# Altium PCB single-though-hole-bottom.PcbDoc
Units mil, origin at the board's own origin, x right, y up, seen from the top; angles counter-clockwise.
Board outline 2305 x 1285.79 mil, 2 copper layers (Top Layer, Bottom Layer), stack 61.7 mil thick; 1 components, 0 nets, 2 pads, 0 vias.
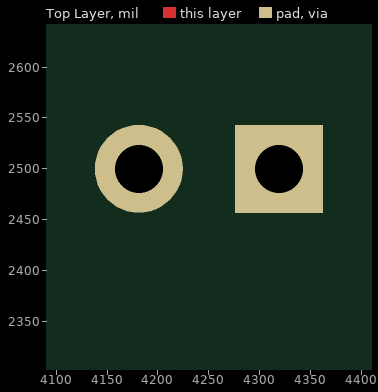
[diagram p0: Top Layer view]
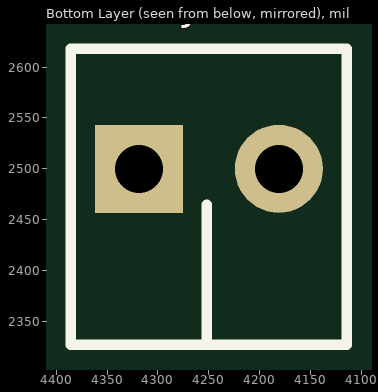
[diagram p1: Bottom Layer view, seen from below]

## Layer stack, top to bottom
Top Solder: solder mask 0.4, Solder Resist, Dk 3.5
Top Layer: signal copper 1.4
Dielectric 1: dielectric 58.9, FR-4, Dk 4.8
Bottom Layer: signal copper 1.4
Bottom Solder: solder mask 0.4, Solder Resist, Dk 3.5

## Board outline
3185,1915 3185,3200.79 5490,3200.79 5490,1915

## Design rules (kind name [scope] priority, off if disabled: settings)
Clearance [All] p1: gap=10 ignorepadtopadclearanceinfootprint=FALSE except(0: Arc-Hole Track-Hole SMDPad-Hole THPad-Hole Via-Hole Fill-Hole Poly-Hole Region-Hole Text-Hole)
PolygonConnect [All] p1: connectstyle=Relief reliefconductorwidth=10 reliefentries=4 polygonreliefangle="90 Angle" airgapwidth=10
RoutingVias [All] p1: holewidth=28 width=50 viastyle="Through Hole" minholewidth=28 minwidth=50 maxholewidth=28 maxwidth=50
SolderMaskExpansion [All] p1: expansion=0 istentingtop=FALSE
Width [All] p1: maxlimit=10 minlimit=10 preferedwidth=10
30 further rules are at their usual default settings.

## Components (designator, comment, footprint, x,y, rotation, side; value= is the part's Value field where it differs from the comment)
J1 "1984617" 1984617 4250,2500 r180 bottom

## Footprints (in the part's own frame and the unit in brackets; to place one, negate y for a bottom-side part, rotate by r counter-clockwise, add the part's x,y. Pads: shape width x height; smd on the part's side, far side on the other; paste and mask are expansions set on the pad)
1984617 [mm] "Phoenix 2-pin 3.5mm screw terminal"
  rect 2.2x2.2 hole 1.2: 1(-1.75,0)
  round 2.2 hole 1.2: 2(1.75,0)
  silkscreen extent -3.45,-4.4 3.45,3, body extent -3.51,-4.5 4.06,3.1, height 9.05

## Part data
J1: "TERM BLK 2POS SIDE ENT 3.5MM PCB", mfg=Phoenix, mpn=1984617, panel_monkey__generated_schlib_path=symbols/1984617-019dd87a.SchLib, panel_monkey__generated_symbol_ref=1984617, panel_monkey__part_id=019dd87a-1e88-7c21-999a-0ec9482a2608, panel_monkey__source_handle=1984617, panel_monkey__source_symbol_ref=1984617, panel_monkey__version_id=019dd87a-1e88-76b1-a6d7-1264793133da

## Nets (pads, with @x,y where several pads share a name; then routed paths per layer and width w, separated by ;. In a path a pad name is that pad's centre, name@x,y a point inside that pad or via, vN(x,y) a via of type N, cw(c..) or ccw(c..) an arc to the next point about the centre after c; other vN are vias at no path point)
pads on no net: J1.1 J1.2

## Silkscreen, mask and mechanical layers (free items; w line width, h text height)
Mechanical 8:
  the board outline again, w10